# Altium PCB Soldeerstaion2 - Copy.PcbDoc
Units mil, origin at the board's own origin, x right, y up, seen from the top; angles counter-clockwise.
Board outline 6170 x 4230 mil, 2 copper layers (Top Layer, Bottom Layer); 77 components, 72 nets, 289 pads, 36 vias.
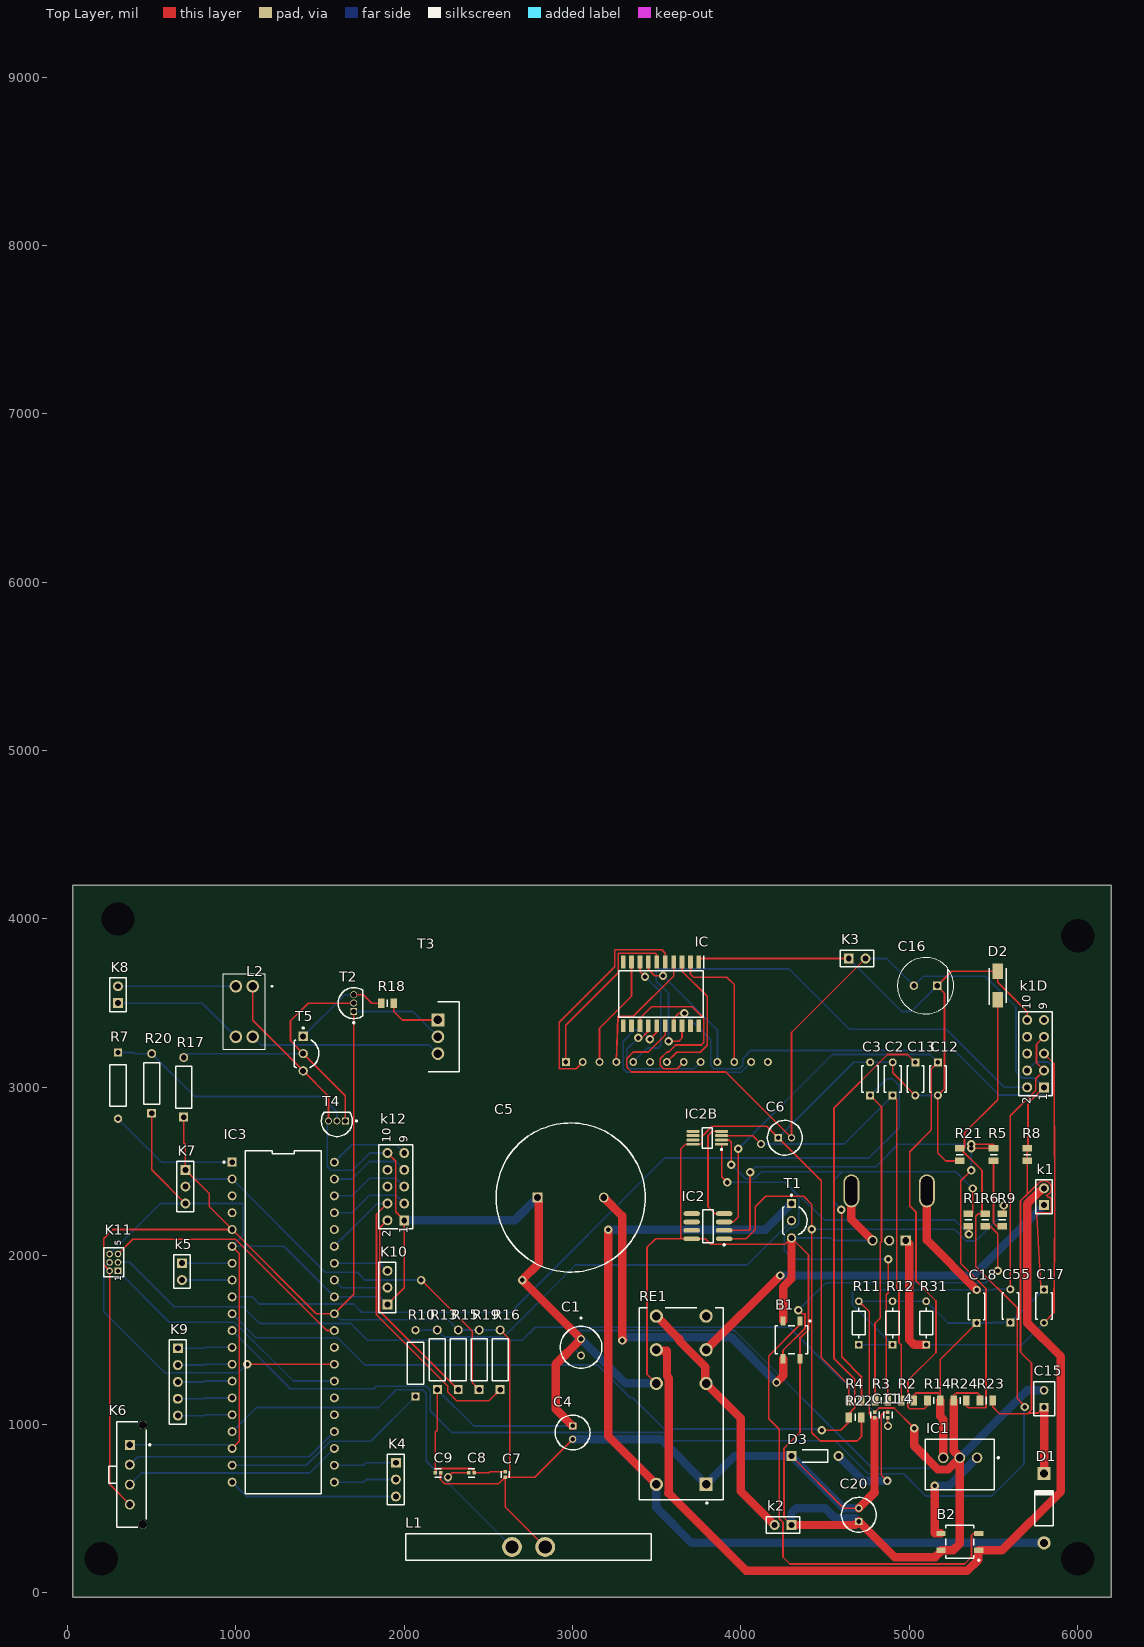
[diagram p0: Top Layer view]
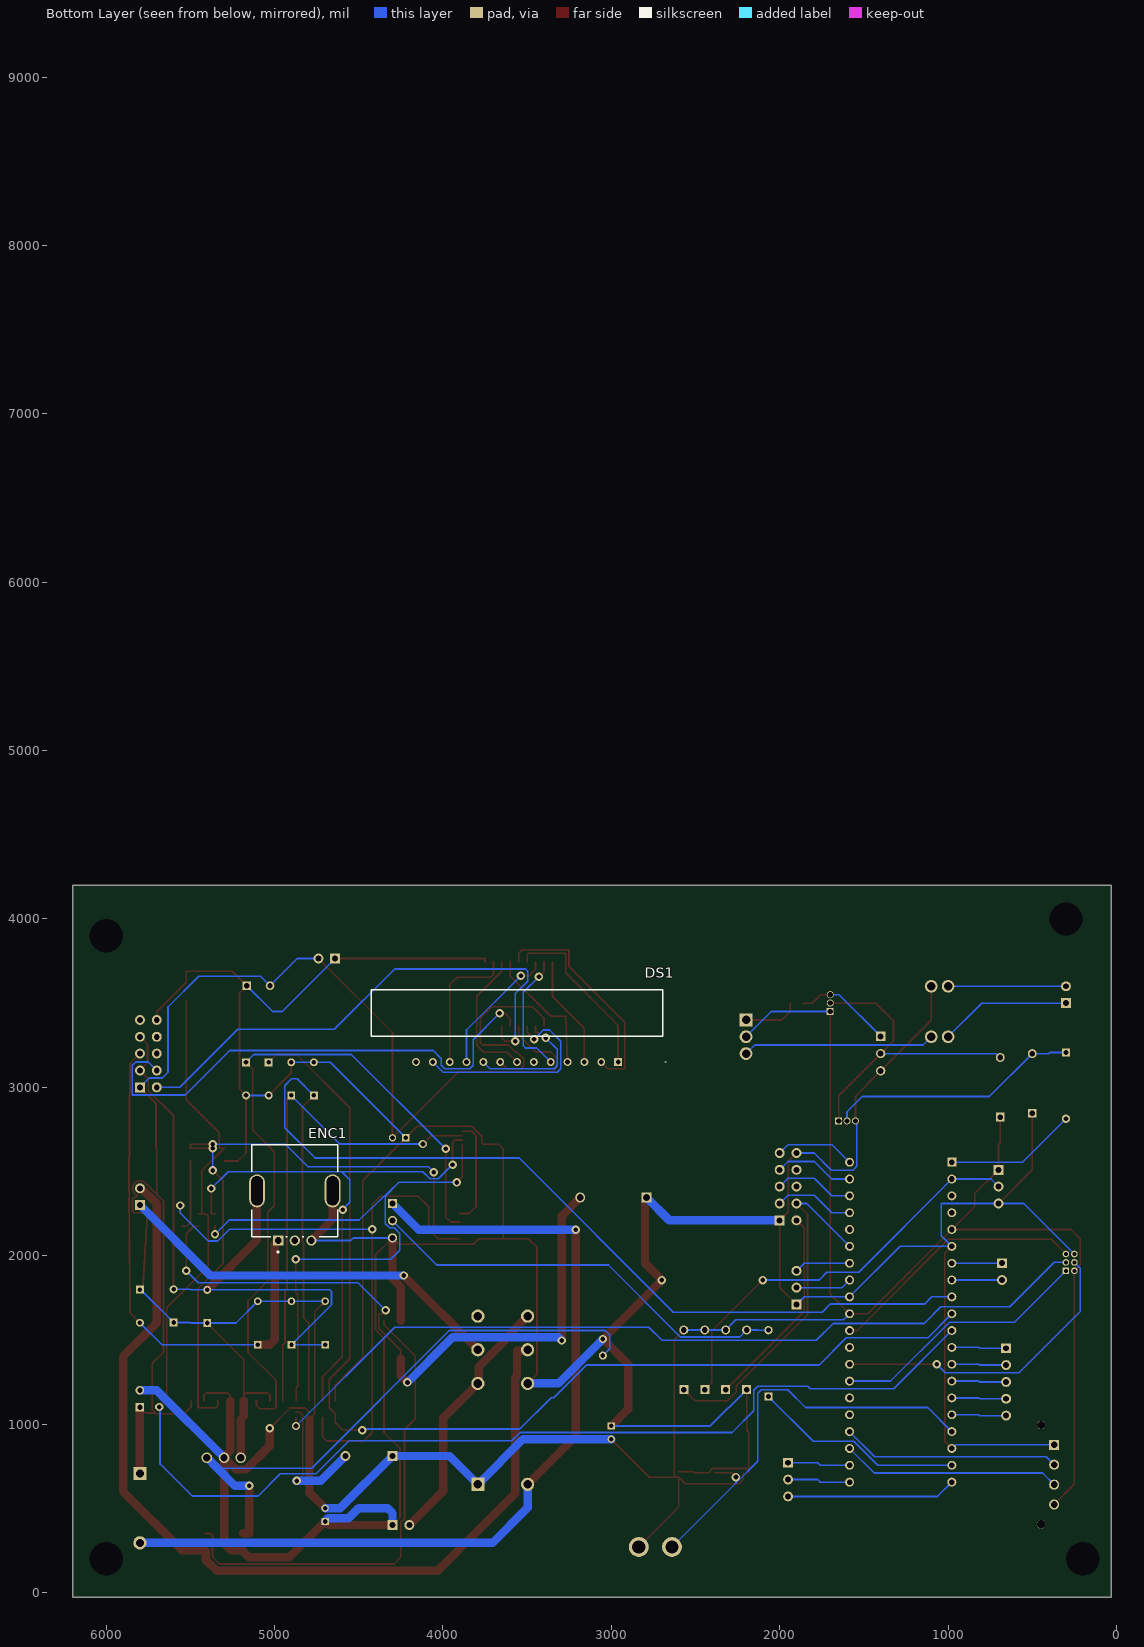
[diagram p1: Bottom Layer view, seen from below]

## Layer stack, top to bottom
Top Solder: solder mask 0.4, Solder Resist, Dk 3.5
Top Layer: signal copper 1.4
Dielectric 1: dielectric 12.6, FR-4, Dk 4.8
Bottom Layer: signal copper 1.4
Bottom Solder: solder mask 0.4, Solder Resist, Dk 3.5

## Board outline
30,-30 6200,-30 6200,4200 30,4200

## Design rules (kind name [scope] priority, off if disabled: settings)
AssemblyTestPointUsage [All] p0: scope1count=1 scope1_0_kind=Board scope1_0_value=Board scope2count=1 scope2_0_kind=Board scope2_0_value=Board commentlength=0
AssemblyTestpoint [All] p0: scope1count=1 scope1_0_kind=Board scope1_0_value=Board scope2count=1 scope2_0_kind=Board scope2_0_value=Board commentlength=0
Clearance [All] p0: scope1count=1 scope1_0_kind=Board scope1_0_value=Board scope2count=1 scope2_0_kind=Board scope2_0_value=Board commentlength=0 gap=10
Clearance [All] p1: gap=10 ignorepadtopadclearanceinfootprint=FALSE except(0: Arc-Hole Track-Hole SMDPad-Hole THPad-Hole Via-Hole Fill-Hole Poly-Hole Region-Hole Text-Hole)
ComponentClearance [All] p0: scope1count=1 scope1_0_kind=Board scope1_0_value=Board scope2count=1 scope2_0_kind=Board scope2_0_value=Board commentlength=0 gap=10 collisioncheckmode=3
DiffPairsRouting [All] p0: scope1count=1 scope1_0_kind=Board scope1_0_value=Board scope2count=1 scope2_0_kind=Board scope2_0_value=Board commentlength=0
FabricationTestPointUsage [All] p0: scope1count=1 scope1_0_kind=Board scope1_0_value=Board scope2count=1 scope2_0_kind=Board scope2_0_value=Board commentlength=0 valid=0 allowmultiple=FALSE
FabricationTestpoint [All] p0: scope1count=1 scope1_0_kind=Board scope1_0_value=Board scope2count=1 scope2_0_kind=Board scope2_0_value=Board commentlength=0 side=3 testpointundercomponent=TRUE minsize=40 maxsize=100 preferedsize=60 minholesize=0 maxholesize=40 preferedholesize=32 testpointgrid=1
FanoutControl Fanout_BGA [All] p0 off: scope1count=1 scope1_0_kind=Board scope1_0_value=Board scope2count=1 scope2_0_kind=Board scope2_0_value=Board commentlength=69 // Protel DXP Scope 1 Expression Was: IsBGA   Fanout_BGA (Default Rule)
FanoutControl Fanout_LCC [All] p0 off: scope1count=1 scope1_0_kind=Board scope1_0_value=Board scope2count=1 scope2_0_kind=Board scope2_0_value=Board commentlength=69 // Protel DXP Scope 1 Expression Was: IsLCC   Fanout_LCC (Default Rule)
FanoutControl Fanout_SOIC [All] p0 off: scope1count=1 scope1_0_kind=Board scope1_0_value=Board scope2count=1 scope2_0_kind=Board scope2_0_value=Board commentlength=71 // Protel DXP Scope 1 Expression Was: IsSOIC   Fanout_SOIC (Default Rule)
FanoutControl Fanout_Small [All] p0 off: scope1count=1 scope1_0_kind=Board scope1_0_value=Board scope2count=1 scope2_0_kind=Board scope2_0_value=Board commentlength=84 // Protel DXP Scope 1 Expression Was: (CompPinCount < 5)   Fanout_Small (Default Rule)
FanoutControl Fanout_Default [All] p0: scope1count=1 scope1_0_kind=Board scope1_0_value=Board scope2count=1 scope2_0_kind=Board scope2_0_value=Board commentlength=30 // Fanout_Default (Default Rule)
Height [All] p0: scope1count=1 scope1_0_kind=Board scope1_0_value=Board scope2count=1 scope2_0_kind=Board scope2_0_value=Board commentlength=0
HoleSize [All] p0: scope1count=1 scope1_0_kind=Board scope1_0_value=Board scope2count=1 scope2_0_kind=Board scope2_0_value=Board commentlength=0 absolutevalues=TRUE maxlimit=100 minlimit=1 maxpercent=80.000 minpercent=20.000
HoleToHoleClearance [All] p0: scope1count=1 scope1_0_kind=Board scope1_0_value=Board scope2count=1 scope2_0_kind=Board scope2_0_value=Board commentlength=0
LayerPairs [All] p0: scope1count=1 scope1_0_kind=Board scope1_0_value=Board scope2count=1 scope2_0_kind=Board scope2_0_value=Board commentlength=0 enforce=TRUE
MinimumSolderMaskSliver [All] p0: scope1count=1 scope1_0_kind=Board scope1_0_value=Board scope2count=1 scope2_0_kind=Board scope2_0_value=Board commentlength=0
NetAntennae [All] p0: scope1count=1 scope1_0_kind=Board scope1_0_value=Board scope2count=1 scope2_0_kind=Board scope2_0_value=Board commentlength=0
PasteMaskExpansion [All] p0: scope1count=1 scope1_0_kind=Board scope1_0_value=Board scope2count=1 scope2_0_kind=Board scope2_0_value=Board commentlength=0 expansion=0
PlaneClearance [All] p0: scope1count=1 scope1_0_kind=Board scope1_0_value=Board scope2count=1 scope2_0_kind=Board scope2_0_value=Board commentlength=0 clearance=20
PlaneConnect [All] p0: scope1count=1 scope1_0_kind=Board scope1_0_value=Board scope2count=1 scope2_0_kind=Board scope2_0_value=Board commentlength=0 planeconnectstyle=Relief reliefexpansion=20 reliefentries=4 reliefconductorwidth=10 reliefairgap=10
PolygonConnect [All] p0: scope1count=1 scope1_0_kind=Board scope1_0_value=Board scope2count=1 scope2_0_kind=Board scope2_0_value=Board commentlength=0 connectstyle=Relief reliefconductorwidth=10 reliefentries=4 polygonreliefangle="90 Angle"
PolygonConnect [All] p1: connectstyle=Relief reliefconductorwidth=10 reliefentries=4 polygonreliefangle="90 Angle" airgapwidth=10
RoutingCorners [All] p0: scope1count=1 scope1_0_kind=Board scope1_0_value=Board scope2count=1 scope2_0_kind=Board scope2_0_value=Board commentlength=0 cornerstyle=45-Degree minsetback=100 maxsetback=100
RoutingLayers [All] p0: scope1count=1 scope1_0_kind=Board scope1_0_value=Board scope2count=1 scope2_0_kind=Board scope2_0_value=Board commentlength=0 top layer=Automatic bottom layer=Automatic
RoutingPriority [All] p0: scope1count=1 scope1_0_kind=Board scope1_0_value=Board scope2count=1 scope2_0_kind=Board scope2_0_value=Board commentlength=0
RoutingTopology [All] p0: scope1count=1 scope1_0_kind=Board scope1_0_value=Board scope2count=1 scope2_0_kind=Board scope2_0_value=Board commentlength=0 topology=Shortest
RoutingVias [All] p0: scope1count=1 scope1_0_kind=Board scope1_0_value=Board scope2count=1 scope2_0_kind=Board scope2_0_value=Board commentlength=0 holewidth=28 width=50 viastyle="Through Hole" minholewidth=28 minwidth=50 maxholewidth=28 maxwidth=50
RoutingVias [All] p1: holewidth=28 width=50 viastyle="Through Hole" minholewidth=28 minwidth=50 maxholewidth=28 maxwidth=50
ShortCircuit [All] p0: scope1count=1 scope1_0_kind=Board scope1_0_value=Board scope2count=1 scope2_0_kind=Board scope2_0_value=Board commentlength=0 allowed=FALSE
SilkToBoardRegionClearance [All] p0: scope1count=1 scope1_0_kind=Board scope1_0_value=Board scope2count=1 scope2_0_kind=Board scope2_0_value=Board commentlength=0
SilkToSilkClearance [All] p0: scope1count=1 scope1_0_kind=Board scope1_0_value=Board scope2count=1 scope2_0_kind=Board scope2_0_value=Board commentlength=0
SilkToSolderMaskClearance [All] p0 off: scope1count=1 scope1_0_kind=Board scope1_0_value=Board scope2count=1 scope2_0_kind=Board scope2_0_value=Board commentlength=44 // Protel DXP Scope 1 Expression Was: IsPad
SolderMaskExpansion [All] p0: scope1count=1 scope1_0_kind=Board scope1_0_value=Board scope2count=1 scope2_0_kind=Board scope2_0_value=Board commentlength=0 expansion=4
SolderMaskExpansion [All] p1: expansion=4 istentingtop=FALSE
UnRoutedNet [All] p0: scope1count=1 scope1_0_kind=Board scope1_0_value=Board scope2count=1 scope2_0_kind=Board scope2_0_value=Board commentlength=0
UnpouredPolygon [All] p0: scope1count=1 scope1_0_kind=Board scope1_0_value=Board scope2count=1 scope2_0_kind=Board scope2_0_value=Board commentlength=0
Width [All] p0: scope1count=1 scope1_0_kind=Board scope1_0_value=Board scope2count=1 scope2_0_kind=Board scope2_0_value=Board commentlength=0 maxlimit=50 minlimit=50 preferedwidth=50
Width [All] p1: maxlimit=50 minlimit=50 preferedwidth=50 minimp=50.000000 maximp=50.000000 favimp=50.000000
30 further rules are at their usual default settings.

## Classes and differential pairs
component class voeding: B1 B2 C1 C5 C20 D1 D2 IC1 k1 k2 R6 R21 RE1
component class thermokoppel: C2 C3 C6 C7 C12 C13 IC2 IC2B K3 R1 R2 R3 R4 R5 R8 R9 R14 R22 R23 R24
component class "PWU soldeerbout": K8 L2 R17 R18 R20 T2 T3 T4 T5
component class Display: C15 C16 C17 C18 C55 DS1 ENC1 IC k1D R11 R12 R31
component class CPU: C4 C8 C9 C11 C14 D3 IC3 K4 k5 K6 K7 K9 K10 K11 k12 L1 R7 R10 R13 R15 R16 R19 T1

## Components (designator, comment, footprint, x,y, rotation, side; value= is the part's Value field where it differs from the comment)
B1 "MB6S-TP" FP-MBS-1-MFG 4300,1500 r0 top
B2 "MB6S-TP" FP-MBS-1-MFG 5300,300 r270 top
C1 "100uF 25V" MCGPR25V107M6.3X11 3050,1455.79 r90 top
C2 "10nf" FP-RDE0M1-MFG 4901.26,3050.08 r90 top
C3 "10nf" FP-RDE0M1-MFG 4767.09,3050.08 r90 top
C4 "10uF 50V" CAPPRD200W52D525H1200 3000,988.73 r270 top
C5 "4700uF  50V" CAPPRD1000W82D2250H4300 2791.3,2345 r0 top
C6 "MCGPR50V106M5X11" CAPPRD200W52D525H1200 4221.26,2700 r0 top
C7 "100nf" FP-C0402-BB-MFG 2600,700 r90 top
C8 "100n" FP-C0402-BB-MFG 2400,709.99 r0 top
C9 "100n" FP-C0402-BB-MFG 2200,709.99 r180 top
C11 "100n" FP-C0402-BB-MFG 4794.76,1053.85 r90 top
C12 "10nf" FP-RDE0M1-MFG 5169.61,3050.08 r270 top
C13 "10nf" FP-RDE0M1-MFG 5035.43,3050.08 r270 top
C14 "100n" FP-C0402-BB-MFG 4872.64,1053.85 r270 top
C15 "100nf" FP-C320C-MFG 5800,1150 r90 top
C16 "100uf" FP-RAD-TH-D_8_0_5-L_11_5-MFG 5096.1,3603.43 r180 top
C17 "10nf" FP-RDE0M1-MFG 5800,1700 r270 top
C18 "10nf" FP-RDE0M1-MFG 5400,1698.43 r90 top
C20 "10uF 50V" CAPPRD200W52D525H1200 4700,421.26 r90 top
C55 "10nf" FP-RDE0M1-MFG 5600,1701.57 r90 top
D1 "Diode 1N4007" DO-41 5800,500 r90 top
D2 "5,1V 500mW" DIOM5226X240N 5525,3605 r90 top
D3 "Diode 1N4148" DO-35 4439.76,809.99 r180 top
DS1 "LTC_46454G" LTC46454G 2960,3150 r0 bottom
ENC1 "PEC11R-4015F-N0024" FP-PEC11R-4015F-N0024-MFG 4880,2385 r180 bottom
IC "TM1637" SOIC127P1045X280-20N 3525,3555 r270 top
IC1 "OKI-78SR-5/1.5-W36-C" MURA-OKI-78SR-3 5300,800 r180 top
IC2 "IC2A" SOIC-SN8_M 3803.54,2175 r180 top
IC2B "MCP6002-E/MS" MSOP-MS8_M 3800,2700 r180 top
IC3 "ATMEGA4809-PF" FP-C04-016-MFG 1281.25,1604.99 r0 top
k1 "Header 2" HDR1X2 5800,2300 r90 top
k1D "Header 5X2" HDR2X5 5800,3000 r90 top
k2 "Header 2" HDR1X2 4300,400 r180 top
K3 "Header 2" HDR1X2 4640,3765 r0 top
K4 "Header 3" HDR1X3 1950,769.99 r270 top
k5 "Header 2" HDR1X2 680,1954.99 r270 top
K6 "66200411122" 66200411122 380.04,699.04 r90 top
K7 "Header 3" HDR1X3 700,2509.99 r270 top
K8 "Header 2" HDR1X2 300,3500 r90 top
K9 "Header 5" HDR1X5 655,1449.99 r270 top
K10 "Header 3" HDR1X3 1900,1709.99 r90 top
K11 "MHDR2X3" MHDR2X3 300,1909.99 r90 top
k12 "Header 5X2" HDR2X5 2000,2209.99 r90 top
L1 "760308201" 3737 2738.43,269.99 r0 top
L2 "CM2545X171B-10" CM2545X171B10 1100,3600 r180 top
R1 "18K" RESC2012X65N 5350.35,2212.09 r90 top
R2 "5K6" RESC2012X65N 4989.57,1139.65 r0 top
R3 "5K6" RESC2012X65N 4833.74,1139.65 r0 top
R4 "100ohm" RESC2012X60N 4677.91,1139.65 r0 top
R5 "18K" RESC2012X65N 5500,2600 r90 top
R6 "68K" RESC2012X60N 5451.06,2212.09 r270 top
R7 "10k" FP-MBB0207-MFG 300,3009.99 r270 top
R8 "1M" RESC2012X65N 5700,2600 r90 top
R9 "18K" RESC2012X65N 5551.77,2212.09 r270 top
R10 "10k" FP-MBB0207-MFG 2067.09,1360.66 r90 top
R11 "10k" FP-CF18-MFG 4700,1600 r90 top
R12 "10k" FP-CF18-MFG 4900,1600 r90 top
R13 "4K75" RESA60-630X240 2196.34,1381.33 r90 top
R14 "5K6" RESC2012X65N 5145.39,1139.65 r0 top
R15 "4K75" RESA60-630X240 2320.67,1381.33 r90 top
R16 "4K75" RESA60-630X240 2569.33,1381.33 r90 top
R17 "4K75" RESA60-630X240 690,3000 r90 top
R18 "100ohm" RESC2012X60N 1900,3500 r0 top
R19 "4K75" RESA60-630X240 2445,1381.33 r90 top
R20 "4K75" RESA60-630X240 500,3022.83 r90 top
R21 "10K" RESC2012X65N 5300,2600 r90 top
R22 "5K6" RESC2012X65N 4677.91,1038.94 r0 top
R23 "10M" RESC2013X65N 5457.05,1139.65 r0 top
R24 "100ohm" RESC2012X60N 5301.22,1139.65 r0 top
R31 "10K" FP-CF18-MFG 5100,1600 r90 top
RE1 "RT424005F" FP-RT424005F-MFG 3645,1120 r90 top
T1 "BC547CZL1G" ONSC-TO-92-3-29-11_AM_BL 4300,2207.63 r270 top
T2 "BC547B" ONSC-TO-92-3-29-11 1700,3500 r90 top
T3 "IRF9Z34NPBF" TO254P469X1042X1967-3P 2200,3400 r270 top
T4 "T4" ONSC-TO-92-3-29-11 1600,2800 r180 top
T5 "T5" ONSC-TO-92-3-29-11_AM_BL 1400,3200 r270 top

## Footprints (in the part's own frame and the unit in brackets; to place one, negate y for a bottom-side part, rotate by r counter-clockwise, add the part's x,y. Pads: shape width x height; smd on the part's side, far side on the other; paste and mask are expansions set on the pad)
3737 [mm] "THT Charging Coil ,2 Pin, Body 37x37mm"
  round 3 hole 2: 1(-2.5,0) 2(2.5,0)
  silkscreen extent -18.5,-2 18.5,2
66200411122 [mm] "3.00mm Male Single Row Vertical Header, 4p"
  rect 1.52x1.52 hole 1.02: 1(4.5,0.255)
  round 1.52 hole 1.02: 2(1.5,0.255) 3(-1.5,0.255) 4(-4.5,0.255)
  round 1.27 hole 1.27 unplated: MH1(-7.5,-1.705) MH2(7.5,-1.705)
  silkscreen extent -7.95,-2.88 7.95,3.46
CAPPRD200W52D525H1200 [mm]
  rect 1.1x1.1 hole 0.7: 1(0,0)
  round 1.1 hole 0.7: 2(2,0)
  silkscreen extent -1.62,-2.62 3.62,2.63
CAPPRD1000W82D2250H4300 [mm]
  rect 1.5x1.5 hole 1: 1(0,0)
  round 1.5 hole 1: 2(10,0)
  silkscreen extent -6.25,-11.25 16.25,11.25
CM2545X171B10 [mil]
  round 75 hole 50: 1(0,0) 2(100,0) 3(100,300) 4(0,300)
  silkscreen extent -118,-74 174,374
DIOM5226X240N [mm]
  rect 2.35x1.55 smd: 1(-2.15,0) 2(2.15,0)
  silkscreen extent -2.93,-1.3 2.6,1.3
DO-35 [mm] "Diode, Axial; Body 3.8 x 1.9 mm (LxDia. max), Lead Dia. 0.53 mm (max)"
  round 1.5 hole 0.9: 1(-3.55,0)
  rect 1.5x1.5 hole 0.9: 2(3.55,0)
  silkscreen extent -1.95,-0.95 1.95,0.95
DO-41 [mm] "Diode, Axial; Body 5.2 x 2.7 mm (LxDia. max), Lead Dia. 0.86 mm (max)"
  round 2 hole 1.2: 1(-5.23,0)
  rect 2x2 hole 1.2: 2(5.23,0)
  silkscreen extent -2.65,-1.41 2.75,1.4
FP-C04-016-MFG [mm]
  rect 1.35x1.35 hole 0.85 paste-1000 mask+0: 1(-7.715,24.13)
  round 1.35 hole 0.85 paste-1000 mask+0: 2(-7.715,21.59) 3(-7.715,19.05) 4(-7.715,16.51) 5(-7.715,13.97) 6(-7.715,11.43) 7(-7.715,8.89) 8(-7.715,6.35) 9(-7.715,3.81) 10(-7.715,1.27) 11(-7.715,-1.27) 12(-7.715,-3.81) 13(-7.715,-6.35) 14(-7.715,-8.89) 15(-7.715,-11.43) 16(-7.715,-13.97) 17(-7.715,-16.51) 18(-7.715,-19.05) 19(-7.715,-21.59) 20(-7.715,-24.13) 21(7.715,-24.13) 22(7.715,-21.59) 23(7.715,-19.05) 24(7.715,-16.51) 25(7.715,-13.97) 26(7.715,-11.43) 27(7.715,-8.89) 28(7.715,-6.35) 29(7.715,-3.81) 30(7.715,-1.27) 31(7.715,1.27) 32(7.715,3.81) 33(7.715,6.35) 34(7.715,8.89) 35(7.715,11.43) 36(7.715,13.97) 37(7.715,16.51) 38(7.715,19.05) 39(7.715,21.59) 40(7.715,24.13)
  silkscreen extent -9.06,-25.88 5.76,25.88
FP-C320C-MFG [mm]
  rect 1.3x1.3 hole 0.8 paste-1000 mask+0: 1(-1.27,0)
  round 1.3 hole 0.8 paste-1000 mask+0: 2(1.27,0)
  silkscreen extent -2.54,-1.59 2.54,1.59
FP-C0402-BB-MFG [mm]
  rect 0.52x0.52 smd paste+0 mask+0: 1(-0.4,0) 2(0.4,0)
  silkscreen extent -0.5,-0.64 0.5,0.64
FP-CF18-MFG [mm]
  rect 1.15x1.15 hole 0.65 paste-1000 mask+0: 1(-3.28,0)
  round 1.15 hole 0.65 paste-1000 mask+0: 2(3.28,0)
  silkscreen extent -2.3,-1 2.3,1
FP-MBB0207-MFG [mm]
  rect 1.25x1.25 hole 0.75 paste-1000 mask+0: 1(-5,0)
  round 1.25 hole 0.75 paste-1000 mask+0: 2(5,0)
  silkscreen extent -3.15,-1.25 3.15,1.25
FP-MBS-1-MFG [mm]
  rect 0.8x1.4 smd paste+0 mask+0: 1(1.27,2.85) 2(-1.27,2.85) 3(-1.27,-2.85) 4(1.27,-2.85)
  silkscreen extent -2.47,-2.1 2.9,2.97
FP-PEC11R-4015F-N0024-MFG [mm]
  rrect100% 2.4x5 hole 4.4 slot 1.8 at 0 deg paste-1000 mask+0: 1(-5.7,0) 2(5.7,0)
  rect 1.55x1.55 hole 1 paste-1000 mask+0: A(-2.5,-7.5)
  round 1.55 hole 1 paste-1000 mask+0: B(2.5,-7.5) C(0,-7.5)
  Top Component Center keep-out region: 13.232,-40.955 12.432,-40.955 12.432,-39.055 13.232,-39.055
  silkscreen extent -6.5,-9.35 6.5,6.95
FP-RAD-TH-D_8_0_5-L_11_5-MFG [mm]
  rect 1.3x1.3 hole 0.8 paste-1000 mask+0: 1(-1.75,0)
  round 1.3 hole 0.8 paste-1000 mask+0: 2(1.75,0)
  silkscreen extent -4.25,-4.25 4.25,4.25
FP-RDE0M1-MFG [mm]
  rect 1.2x1.2 hole 0.7 paste-1000 mask+0: 1(-2.5,0)
  round 1.2 hole 0.7 paste-1000 mask+0: 2(2.5,0)
  silkscreen extent -2,-1.25 2,1.25
FP-RT424005F-MFG [mm]
  round 2 hole 1.3 paste-1000 mask+0: 11(8.15,-3.75) 12(3.07,-3.75) 14(13.23,-3.75) 21(8.15,3.75) 22(3.07,3.75) 24(13.23,3.75) A2(-12.15,3.75)
  rect 2x2 hole 1.3 paste-1000 mask+0: A1(-12.15,-3.75)
  silkscreen extent -15.1,-6.35 14.5,6.35
HDR1X2 [mm] "Connector; Header; 2 Position"
  rect 1.5x1.5 hole 0.9: 1(0,0)
  round 1.5 hole 0.9: 2(2.54,0)
  silkscreen extent -1.27,-1.27 3.81,1.27
HDR1X3 [mm] "Connector; Header; 3 Position"
  rect 1.5x1.5 hole 0.9: 1(0,0)
  round 1.5 hole 0.9: 2(2.54,0) 3(5.08,0)
  silkscreen extent -1.27,-1.27 6.35,1.27
HDR1X5 [mm] "Connector; Header; 5 Position"
  rect 1.5x1.5 hole 0.9: 1(0,0)
  round 1.5 hole 0.9: 2(2.54,0) 3(5.08,0) 4(7.62,0) 5(10.16,0)
  silkscreen extent -1.27,-1.27 11.43,1.27
HDR2X5 [mm] "Connector; Header; 5x2 Position"
  rect 1.5x1.5 hole 0.9: 1(0,0)
  round 1.5 hole 0.9: 2(0,2.54) 3(2.54,0) 4(2.54,2.54) 5(5.08,0) 6(5.08,2.54) 7(7.62,0) 8(7.62,2.54) 9(10.16,0) 10(10.16,2.54)
  silkscreen extent -1.27,-1.27 11.43,3.81
LTC46454G [mm]
  rect 1.2x1.2 hole 0.7: 1(0,0)
  round 1.2 hole 0.7: 2(2.54,0) 3(5.08,0) 4(7.62,0) 5(10.16,0) 6(12.7,0) 7(15.24,0) 8(17.78,0) 9(20.32,0) 10(22.86,0) 11(25.4,0) 12(27.94,0) 13(30.48,0)
  silkscreen extent -7.2,-10.9 37.24,0.05
MCGPR25V107M6.3X11 [mm]
  round 1.2 hole 0.7: 1(1.25,0) 2(-1.25,0)
  silkscreen extent -3.15,-3.15 4.53,3.15
MHDR2X3 [mm] "Connector; Header; 3x2 Position"
  rect 1x1 hole 0.6: 1(0,0)
  round 1 hole 0.6: 2(0,1.27) 3(1.27,0) 4(1.27,1.27) 5(2.54,0) 6(2.54,1.27)
  silkscreen extent -0.9,-0.9 3.44,2.17
MSOP-MS8_M [mm] "TSOP, 8-Leads, Body 3x3mm, Pitch 0.65mm, IPC Low Density"
  oval 2x0.45 smd: 1(-2.15,0.975) 2(-2.15,0.325) 3(-2.15,-0.325) 4(-2.15,-0.975) 5(2.15,-0.975) 6(2.15,-0.325) 7(2.15,0.325) 8(2.15,0.975)
  silkscreen extent -2.27,-1.55 0.75,1.87
MURA-OKI-78SR-3 [mm] "THMT, 3-Leads, Body 10.4x7.6mm"
  round 1.6 hole 1.1: 1(-2.6,0) 2(0,0) 3(2.5,0)
  silkscreen extent -5.92,-2.8 5.2,4.8
ONSC-TO-92-3-29-11 [mm] "TO, 3-Leads, Body Dia 4.7mm, Pitch 1.27mm"
  rect 1.05x1.05 hole 0.8: 1(-1.27,0)
  round 1.05 hole 0.8: 2(0,0) 3(1.27,0)
  silkscreen extent -3.07,-1.34 2.35,2.35
ONSC-TO-92-3-29-11_AM_BL [mm] "TO, 3-Leads, Body Dia 4.7mm, Pitch 2.6mm"
  rect 1.4x1.4 hole 0.9: 1(-2.6,0)
  round 1.4 hole 0.9: 2(0,0) 3(2.6,0)
  silkscreen extent -3.97,-1.34 2.13,2.35
RESA60-630X240 [mm] "Axial Resistor, 2-Leads, Dia 2.4mm, Body Length 6.3mm"
  rect 1.35x1.35 hole 0.85: 1(-4.5,0)
  round 1.35 hole 0.85: 2(4.5,0)
  silkscreen extent -3.15,-1.2 3.15,1.2
RESC2012X60N [mm]
  rect 1x1.45 smd: 1(-0.95,0) 2(0.95,0)
  silkscreen extent 0,-0.53 0,0.52
RESC2012X65N [mm]
  rect 1x1.45 smd: 1(-0.95,0) 2(0.95,0)
  silkscreen extent 0,-0.53 0,0.52
RESC2013X65N [mm]
  rect 1x1.45 smd: 1(-0.95,0) 2(0.95,0)
  silkscreen extent 0,-0.54 0,0.54
SOIC127P1045X280-20N [mm]
  rect 1.9x0.7 smd: 1(-4.8,5.715) 2(-4.8,4.445) 3(-4.8,3.175) 4(-4.8,1.905) 5(-4.8,0.635) 6(-4.8,-0.635) 7(-4.8,-1.905) 8(-4.8,-3.175) 9(-4.8,-4.445) 10(-4.8,-5.715) 11(4.8,-5.715) 12(4.8,-4.445) 13(4.8,-3.175) 14(4.8,-1.905) 15(4.8,-0.635) 16(4.8,0.635) 17(4.8,1.905) 18(4.8,3.175) 19(4.8,4.445) 20(4.8,5.715)
  silkscreen extent -5.75,-6.35 3.5,6.42
SOIC-SN8_M [mm] "SOIC, 8-Leads, Body 4.9x3.9mm, Pitch 1.27mm, IPC Low Density"
  oval 2.5x0.7 smd: 1(-2.45,1.905) 2(-2.45,0.635) 3(-2.45,-0.635) 4(-2.45,-1.905) 5(2.45,-1.905) 6(2.45,-0.635) 7(2.45,0.635) 8(2.45,1.905)
  silkscreen extent -2.58,-2.5 0.8,2.93
TO254P469X1042X1967-3P [mm]
  rect 1.92x1.92 / inner round 1.92 / far side rect 1.92x1.92 hole 1.28: 1(0,0)
  round 1.92 hole 1.28: 2(2.54,0) 3(5.08,0)
  silkscreen extent -2.73,-1.49 7.81,3.2

## Part data
B1 B2: library part CMP-56207-000002-1, "BRIDGE RECT 1P 600V 500MA MBS-1"
C1: library part MCGPR25V107M6.3X11, "Capacitor / MCGPR25V107M6.3X11"
C2 C3 C12 C13 C17 C18 C55: library part CMP-06035-022384-1, "Ceramic Capacitor 10nF ±10% 50V X7R Radial"
C4 C20: library part MCGPR50V106M5X11, "Capacitor Polarised / MCGPR50V106M5X11"
C5: library part MCGPR50V478M22X41, "Capacitor  / MCGPR50V478M22X41"
C6: "Capacitor Polarised"
C7 C8 C9 C11 C14: library part CMP-2008-02046-2, "CAP CER 0.1UF 10V X5R 0402"
C15: library part CMP-03020-013948-1, "CAP CER 0.1UF 50V X7R RADIAL"
C16: library part CMP-05427-002079-1, "Aluminum Electrolytic Capacitors (Radial Lead Type) 100uF ±20% 50V"
D1: "1 Amp General Purpose Rectifier"
D2: library part SMAZ5V1-13-F, "Zener Diode / SMAZ5V1-13-F"
D3: "High Conductance Fast Diode"
DS1: "Display"
ENC1: library part CMP-07421-000003-1, "ROTARY ENCODER MECHANICAL 24PPR"
IC: library part TM1637__SOP_, "LED Drive Control Special Circuit"
IC1: library part CMP-2000-05274-1, "Non-Isolated DC/DC Converter, 7.5 W, 7 to 36 V, 1.5 A, -40 to 85 degC, 3-Pin THD, RoHS"
IC2: library part CMP-0187-00365-3, "None"
IC2B: library part CMP-0187-00576-3, "None"
IC3: library part CMP-06276-000616-1, "IC MCU 8BIT 48KB FLASH 40DIP"
k1 k2 K3 k5 K8: "Header, 2-Pin"
k1D k12: "Header, 5-Pin, Dual row"
K4 K7 K10: "Header, 3-Pin"
K6: library part CMP-1502-00442-1, "THT Male Header WR-MPC3, Vertical, Single Row, pitch 3 mm, 4 pins"
K9: "Header, 5-Pin"
K11: "Header, 3-Pin, Dual row"
L1: library part CMP-1432-00001-1, "Wireless Power Charging Coil  WE-WPCC, L=10.0 µH"
L2: "Transformer"
R1 R5 R9: library part CPF0805B18KE, "Resistor / CPF0805B18KE"
R2 R3 R14 R22: library part CPF0805B5K62E, "Resistor / CPF0805B5K62E"
R4 R18 R24: library part CR0805-JW-101ELF, "Resistor / CR0805-JW-101ELF"
R6: library part CR0805-FX-6802GLF, "Resistor / CR0805-FX-6802GLF"
R7 R10: library part CMP-02408-000035-1, "RES 10K OHM 0.6W 1% AXIAL"
R8: library part CPF0805B1M0E, "Resistor / CPF0805B1M0E"
R11 R12 R31: library part CMP-26528-000002-1, "RES 10K OHM 1/8W 5% CF AXIAL"
R13 R15 R16 R17 R19 R20: library part CMP-1659-00066-1, "Axial Resistor, 4.75 KOhm, +/- 1%, 0.25 W, -55 to 155 degC, 2-Pin THD, RoHS, Bulk"
R21: library part CPF0805B10KE, "Resistor / CPF0805B10KE"
R23: library part CRGH0805J10M, "Resistor / CRGH0805J10M"
RE1: library part CMP-03395-000296-1, "RELAY GENERAL PURPOSE DPDT 8A 5V"
T1: library part CMP-1048-01606-1, "Amplifier Transistor, NPN Silicon, 3-Pin TO-92, Pb-Free, Ammo Box"
T2 T4: library part CMP-1048-01467-1, "Amplifier Transistor, NPN Silicon, 3-Pin TO-92, Bulk Box"
T3: "MOSFET MOSFT PCh -55V -17A 100mOhm 23.3nC"
T5: library part CMP-1048-01514-1, "Amplifier Transistor, PNP Silicon, 3-Pin TO-92, Pb-Free, Ammo Box"

## Free pads (board coordinates)
  oval 25x50 hole 314.96: 32(2700,9000)
  oval 25x50 hole 196.85: 32(6000,3900) 33(300,4000) 34(6000,200) 35(200,200)

## Via types
v1: diameter 50, hole 28, Top Layer to Bottom Layer, 36 vias

## Nets (pads, with @x,y where several pads share a name; then routed paths per layer and width w, separated by ;. In a path a pad name is that pad's centre, name@x,y a point inside that pad or via, vN(x,y) a via of type N, cw(c..) or ccw(c..) an arc to the next point about the centre after c; other vN are vias at no path point)
+5V: C4.2 C6.2 C7.1 C9.1 C11.1 C15.1 C16.2 C17.1 C18.1 C20.2 C55.1 D1.2 D3.2 IC1.3 IC3.5 IC3.31 IC.16 k1D.1 K3.2 K6.4 K7.1 K11.2 L1.2 R2.2 R8.1 R8.2 R11.2 R12.2 R14.2 R15.2 R16.2 R17.1 R19.2 R23.2 R31.2 RE1.A1 T2.1 T3.2 | length 24146.2
  Top Layer w10: K6.4 250,641.88 K11.2 215,1944.99 215,2100 269.99,2154.99 IC3.5 ; R17.1 690,2671 700,2661 K7.1 841,2368.99 841,2291.49 IC3.5 ; T2.1 1700,1769.99 IC3.31 1477.5,1654.99 IC3.5 ; C9.1 2215.75,670 2241.3,644.45 2560.19,644.45 C7.1 ; R16.2 2626,1501.82 2626,700 2610.25,684.25 ; L1.2 2600,506.84 C7.1 ; C4.2 2774.26,684.25 2610.25,684.25 ; IC.16 3550,3310.1 3449.9,3210 3361,3210 3321,3170 3321,3120 3350,3091 3909,3091 C6.2 4300,3325 K3.2 ; D3.2 4609.99,500 C20.2 ; R11.2 4761,1668.13 4761,1060 4782.9,1038.1 ; R2.2 5026.97,1170.97 5040,1184 5170,1184 5182.8,1171.2 ; R14.2 5182.8,1171.2 ; C18.1 5182.8,1382.8 5182.8,1171.2 ; R23.2 5494.45,1102.55 5535.93,1061.07 5702.49,1061.07 5706.42,1065 5710,1065 ; C15.1 5765,1065 5710,1065 ; C17.1 5781.38,1817.05 5756.59,2244.89 5756.59,2249.61 5762.45,2255.47 5835.74,2255.47 5844.53,2264.26 5844.53,2335.74 5833.46,2346.81 5825.52,2346.81 5814.45,2357.88 ccw(c5800,2400) 5765.06,2427.6 5756.54,2419.08 5753.96,2419.08 5700,2365.12 ; k1D.1 5705,2905 5705,2637.4 R8.2 R8.1 5700,2365.12 ; C7.1 2610.25,684.25 ; 5700,2365.12 5660,2325.12 5660,1426.5 5725.93,1360.57 5725.93,1084.51 5710,1068.58 5710,1065
  Top Layer w50: C20.2 4794.76,594.76 4793,596.53 4793,1024.36 ; R14.2 5182.8,1046.74 5201.57,1027.96 IC1.3 5201.57,796.43 IC1.3@5201.42,796.27 ; D1.2 C15.1
  Bottom Layer w10: IC3.31 1620.99,1619 2260.16,1619 R15.2 R19.2 R16.2 ; T2.1 2050,3450 T3.2 ; R11.2 R12.2 R31.2 5229.13,1600 C18.1 5498,1600 5501.15,1603.15 C55.1 5795.28,1798.43 C17.1 ; K3.2 4865.63,3765 C16.2 5083.78,3660 5450,3660 5633,3477 5633,3090 5668,3055 5745,3055 k1D.1
  Bottom Layer w50: C4.2 3524.3,909.99 RE1.A1 3960.97,809.99 D3.2 4609.99,500 C20.2
GND: B1.2 B1.4 B2.4 C1.1 C2.2 C3.2 C4.1 C5.1 C6.1 C7.2 C8.2 C9.2 C11.2 C12.2 C13.2 C15.2 C16.1 C20.1 D2.2 ENC1.2 ENC1.B IC1.2 IC2.8 IC2B.8 IC3.6 IC3.18 IC3.32 IC.1 k1D.10 k2.1 K3.1 K6.1 K7.3 K10.1 K11.6 k12.1 k12.10 L2.1 R4.1 R13.1 R20.1 R21.1 R23.1 R24.1 RE1.22 T1.3 T4.3 T5.3 | length 29096
  Top Layer w10: R20.1 500,2509.99 K7.3 ; IC3.18 1020,897.49 1020,2012.49 IC3.6 ; L2.1 1100,3397.64 T5.3 1550,2947.64 T4.3 ; K10.1 2000,1809.99 k12.1 1950,2259.99 1950,2559.99 k12.10 ; C9.2 2184.25,721.25 ; R13.1 2196.34,963.09 2184.25,951 2184.25,721.25 ; C7.2 2509.76,715.75 2504,709.99 C8.2 2415.75,720.25 2400,736 2199,736 2184.25,721.25 ; RE1.22 3442,1296.23 3442,2049 3493,2100 3652,2100 ; IC.1 3750,3765 K3.1 ; k2.1 4255.47,444.53 4255.47,855.47 4350,950 B1.4 4350,1509.25 4400.75,1560 4400.75,2004.52 T1.3 4261.73,2067 3820,2067 3787,2100 IC2.8 3652,2100 ; R4.1 4640.51,1232 4477,1395.51 4477,2444.26 C6.1 4152.26,2769 3830,2769 3770,2709 3770,2671.61 3760,2661.61 IC2B.8 3670,2661.61 3642,2633.61 3642,2110 3652,2100 ; C11.2 4820.17,1095 4909,1095 v1(5029,975) ; C2.2 4901.26,3085.83 C13.2 ; R24.1 5263.82,1170 5277.82,1184 5405.65,1184 5419.65,1170 R23.1 ; R21.1 5217.01,2562.6 5169.61,2610 C12.2 5209,2991.05 5209,3559.43 C16.1 5251.22,3689.65 D2.2 5525,3623 5700,3448 k1D.10
  Top Layer w50: C5.1 C5.1@2795.83,2349.53 ; 2800,2312.6 2800,1955 v1(2700,1855) C1.1 2900,1355 2900,1088.73 C4.1 ; B1.2 4250,1813.38 4297.75,1861.13 4297.75,1872.15 4300,1874.4 T1.3 ; k2.1 4678.74,400 C20.1 4912.26,209 5153.49,209 5187.8,243.31 B2.4 5260,250 5300,290 IC1.2 ; ENC1.2 4655.59,2215.71 ENC1.B ENC1.B@4784.21,2089.72 ; v1(5029,975) 5029,870.82 5169.82,730 5230,730 IC1.2 ; R24.1 5263.82,839.7 5300,803.52 IC1.2
  Bottom Layer w10: K11.6 550,2309.99 K7.3 1039.01,2309.99 1040,2309 1040,2117.49 IC3.6 1285,2054.99 IC3.32 1855,1754.99 K10.1 ; K6.1 956.28,876.21 IC3.18 ; T4.3 1543,2793 1543,2530 1565,2508 1693,2508 1794.99,2609.99 k12.10 ; R13.1 2411.77,988.73 C4.1 ; C6.1 4669.76,3148.5 C3.2 C2.2 ; T1.3 4533,2105.27 4548.54,2089.72 ENC1.B ; K3.1 4955,3450 5011.57,3450 C16.1 ; C13.2 C12.2
  Bottom Layer w50: k12.1 2656.29,2209.99 C5.1 ; C1.1 3314.13,1240.87 RE1.22 ; k2.1 4300,470.71 4329.29,500 4500,500 4560,440 4681.26,440 C20.1 ; IC1.2 5699.77,1199.77 5799.77,1199.77 C15.2
NetB1_1: B1.1 B2.2 | length 2844.7
  Top Layer w10: B1.1 4350,1589 4164.54,1403.54 4164.54,1031.46 4228,968 4228,438 4250,416 4250,210 4291,169 5328,169 5369,210 5369,340 5379,350 B2.2
NetB2_1: B2.1 k1.2 RE1.21 | length 5591.9
  Top Layer w50: RE1.21 3502.8,1435.43 3560.57,1435.43 3560.57,1282.84 3571.73,1271.67 3571.73,592.61 3569.05,589.93 4029.99,129 5344.57,129 5409.64,194.08 B2.1@5409.64,246.64 ; B2.1 5550,250 5900,600 5900,1400 5700,1600 5700,2308.55 5770.52,2379.08 5773.1,2379.08 5796.59,2402.56 5799.14,2400 k1.2
NetB2_3: B2.3 C1.2 IC1.1 | length 3458.5
  Top Layer w50: v1(5151,633) 5151,350 B2.3
  Bottom Layer w10: C1.2 3010,1446.57 3010,1529 3036.24,1555.24 3961.76,1555.24 4780,737 5339.36,737
  Bottom Layer w50: v1(5151,633) 5235.36,633 5339.36,737 IC1.1
NetC2_1: C2.1 IC2B.3 R2.1 | length 2989.9
  Top Layer w10: IC2B.3 4069.2,2712.8 v1(4119,2663) ; C2.1 4926,2926.91 4926,1803 4938.43,1790.57 4938.43,1483.75 4952.17,1470.01 R2.1
  Bottom Layer w10: v1(4119,2663) 4612.61,2663 C2.1
NetC3_1: C3.1 IC3.9 R3.1 | length 6790.1
  Top Layer w10: C3.1 4834.49,2884.25 4834.49,2083.43 4828,2076.94 4828,1629.66 4796.34,1598 R3.1
  Bottom Layer w10: IC3.9 1096.58,1754.99 1138.57,1713 1699,1713 1748,1664 2631.85,1664 3548.32,2580.47 4760.47,2580.47 4940,2760 4940,3010 4900,3050 4865.43,3050 C3.1
NetC8_1: C8.1 IC3.17 L1.1 | length 2558.8
  Top Layer w10: v1(2260,685) 2284.99,709.99 C8.1
  Bottom Layer w10: IC3.17 1120.51,1098 1847,1098 1953,1204 2110,1204 2131,1183 2131,778.99 2260,649.99 ; v1(2260,685) 2260,649.99 ; L1.1 2260,649.99
NetC12_1: C12.1 IC2.3 R14.1 | length 4347.6
  Top Layer w10: IC2.3 3954,2200 3984,2230 v1(3984,2635) ; R14.1 5107.99,1110 5087.99,1090 5002,1090 4992,1100 4992,1259 5158,1425 5158,1731 5040,1849 5040,2258 5002,2296 5002,2618 5130,2746 5130,3108.9 C12.1
  Bottom Layer w10: v1(3984,2635) 4544,3195 5123.11,3195 C12.1
NetC13_1: C13.1 IC3.10 R22.1 | length 6535.8
  Top Layer w10: v1(4479,963) 4593.51,963 4640.51,1010 R22.1 4640.51,1060.51 4676,1096 4676,1265 4553,1388 4553,2878 4870,3195 4988.94,3195 C13.1
  Bottom Layer w10: IC3.10 1119.49,1513 1604,1513 1767,1350 3148.43,1350 3341.93,1156.5 3357.5,1156.5 3544.01,969.99 4472.01,969.99 v1(4479,963)
NetC14_1: C14.1 D3.1 | length 807.3
  Top Layer w10: v1(4868,662) 4833,697 4833,1052.6 4850,1069.6 C14.1
  Bottom Layer w50: D3.1 4724.27,665.25 4724.27,664.05 4870.35,664.05 v1@4872.88,661.52
NetC14_2: C14.2 K11.3 | length 5090.7
  Top Layer w10: C14.2 4872.64,988.36 v1(4873,988)
  Bottom Layer w10: K11.3 370.01,1959.99 633.43,1696.57 1042.66,1696.57 1142.22,1597 1682,1597 1782.08,1496.92 2698.92,1496.92 2777.24,1575.24 4285.76,1575.24 v1(4873,988)
NetC17_2: C17.2 ENC1.A k1D.5 R31.1 | length 3112.3
  Top Layer w10: C17.2 5858.62,1660.2 5863.34,2251.33 5863.37,2254.82 5864.53,2255.97 5864.53,2341.53 5864.11,2346.98 5864.53,2399.48 ccw(c5800,2400) 5864.52,2400.6 5858.62,3141.38 5855.69,3144.31 k1D.5
  Top Layer w50: ENC1.A 5000,2068.15 5000,1500.16 5029.29,1470.87 R31.1
  Bottom Layer w10: R31.1 5669.29,1470.87 C17.2
NetC18_2: C18.2 C55.2 ENC1.1 k1D.3 k1D.7 R11.1 R12.1 | length 3888.8
  Top Layer w10: C55.2 5600,2831 5750,2981 5750,3050 k1D.3 5755,3145 5755,3255 k1D.7
  Top Layer w50: ENC1.1 5104.41,2092.44 C18.2
  Bottom Layer w10: R11.1 R12.1 4662,1708.87 4662,1787 4671.85,1796.85 C18.2 5498,1796.85 5501.15,1800 C55.2
NetD1_1: D1.1 RE1.A2 T1.1 | length 5312
  Top Layer w50: v1(3211,2153) 3211,928.02 RE1.A2
  Bottom Layer w50: v1(3211,2153) 4143.01,2153 T1.1 ; RE1.A2 3497.36,502.64 3705.91,294.09 D1.1
NetD2_1: D2.1 IC3.11 R6.1 R21.2 | length 8364.5
  Top Layer w10: R6.1 R6.1@5432,2249.49 ; D2.1 5525,2926.63 5327.94,2729.57 5327.94,2637.4 R21.2 5432,2505.4 R6.1@5432,2249.49 ; v1(5685.93,1101.07) 5685.93,1105.79 5640,1151.72 5640,1690 5394,1936 5394,2233.49 5410,2249.49 R6.1@5432,2249.49
  Bottom Layer w10: IC3.11 1322.49,1210 1819,1210 1833,1224 2130,1224 2154,1200 2154,1079 2283.01,949.99 3540.87,949.99 3590.86,900 4558,900 4753.95,704.05 4965.95,704.05 5098,572 5490,572 5681,763 5681,1096.15 v1(5685.93,1101.07)
NetDS1_1: DS1.1 IC.6 | length 1052
  Top Layer w10: DS1.1 2960,3369 3271,3680 3271,3797 3490,3797 3500,3787 IC.6
NetDS1_2: DS1.2 IC.5 | length 1358.2
  Top Layer w10: DS1.2 3021,3111 2921,3111 2921,3386 3251,3716 3251,3817 3530,3817 3550,3797 IC.5
NetDS1_3: DS1.3 IC.9 | length 672.7
  Top Layer w10: DS1.3 3160,3350 3350,3540 IC.9
NetDS1_4: DS1.4 IC.4 | length 783.5
  Top Layer w10: DS1.4 3270,3421 3359.93,3421 3600,3661.07 IC.4
NetDS1_5: DS1.5 IC.8 | length 751.5
  Top Layer w10: IC.8 3400,3687 v1(3430,3657)
  Bottom Layer w10: DS1.5 3443.31,3233.31 3510,3233.31 3523,3246.31 3523,3564 v1(3430,3657)
NetDS1_7: DS1.7 IC.3 | length 836.1
  Top Layer w10: DS1.7 3619,3209 3758,3209 3799,3250 3799,3541 3650,3690 IC.3
NetDS1_8: DS1.8 IC.13 | length 1125.5
  Top Layer w10: IC.13 3400,3410 3469,3479 3710,3479 3779,3410 3779,3265 3765,3251 3611.59,3251 3570.59,3210 3561,3210 3521,3170 3521,3130 3540,3111 3621,3111 DS1.8
NetDS1_9: DS1.9 IC.14 | length 768.3
  Top Layer w10: v1(3389,3293) 3409,3293 3443,3327 3450,3327 IC.14
  Bottom Layer w10: v1(3389,3293) 3321,3225 3321,3130 3340,3111 3721,3111 DS1.9
NetDS1_10: DS1.10 IC.7 | length 792.5
  Top Layer w10: IC.7 3450,3701 3488,3663 v1(3537,3663)
  Bottom Layer w10: v1(3537,3663) 3860,3340 DS1.10
NetDS1_11: DS1.11 IC.2 | length 817.7
  Top Layer w10: IC.2 3700,3672 3718,3654 3916,3654 3960,3610 DS1.11
NetDS1_12: DS1.12 IC.15 | length 1260.3
  Top Layer w10: v1(3459,3286) 3500,3327 IC.15
  Bottom Layer w10: v1(3459,3286) 3405,3340 3367,3340 3301,3274 3301,3111 3322,3090 4000,3090 DS1.12
NetIC2_1: IC2.1 R9.1 R22.2 | length 3859.4
  Top Layer w10: IC2.1 4030,2100 4085,2155 4085,2290 4148,2353 4372,2353 4420.75,2304.25 v1(4420.75,2156) 4420.75,948.25 4470,899 4690.31,899 4715.31,924 R22.2 ; R9.1 5560,2249.49 v1(5560,2298)
  Bottom Layer w10: v1(4420.75,2156) 5268,2156 5337,2087 5394,2087 5560,2253 v1(5560,2298)
NetIC2_2: IC2.2 R5.2 R24.2 | length 3950.3
  Top Layer w10: IC2.2 4051,2150 4054,2153 v1(4054,2496) ; R24.2 5338.62,1107.38 5350,1096 5455,1096 5455,1804 5306,1953 5306,2444 v1(5368,2506) ; v1(5368,2637.4) R5.2 5500,2661 v1(5368,2661)
  Bottom Layer w10: v1(4054,2496) 4086,2528 4802,2528 4935,2661 v1(5368,2661) ; v1(5368,2506) v1(5368,2637.4)
NetIC2_4: IC2.4 IC2B.4 | length 626.4
  Top Layer w10: IC2B.4 3830,2738.39 3804,2712.39 3804,2290 3844,2250 IC2.4
NetIC2B_1: IC2B.1 R1.1 R3.2 | length 3827.1
  Top Layer w10: IC2B.1 3885,2661.61 3885,2469 v1(3919,2435) ; R3.2 4871.14,1216 4862,1225.14 4862,1767 4874,1779 v1(4874,1979) ; R1.1 5354,2174.69 v1(5354,2127)
  Bottom Layer w10: v1(3919,2435) 4261,2435 ; v1(4874,1979) 4310,1979 4257,2032 4257,2132 4290,2165 4318,2165 4343,2190 4343,2353 4261,2435 ; v1(5354,2127) 5269.43,2211.57 4498.43,2211.57 4261,2435
NetIC2B_2: IC2B.2 R1.2 R4.2 | length 3347
  Top Layer w10: IC2B.2 3930,2687.2 3943,2674.2 v1(3943,2540) ; v1(4595.59,2272) 4598,2269.59 4598,1399 4715.31,1281.69 R4.2 ; R1.2 5376,2249.49 v1(5376,2399)
  Bottom Layer w10: v1(3943,2540) 3944,2540 4028,2456 4077,2456 4120,2499 4602,2499 ; v1(4595.59,2272) 4595.59,2274.41 4553,2317 4553,2450 4602,2499 ; v1(5376,2399) 5276,2499 4602,2499
NetIC3_1: IC3.1 R7.2 | length 784.4
  Bottom Layer w10: R7.2 558.15,2554.99 IC3.1
NetIC3_2: IC3.2 K7.2 R19.1 | length 2460.9
  Top Layer w10: v1(2100,1855) 2403,1552 2403,1246.16 R19.1
  Bottom Layer w10: K7.2 745,2454.99 IC3.2 1531.49,1901 1720,1901 1766,1855 v1(2100,1855)
NetIC3_7: IC3.7 k5.1 | length 297.5
  Bottom Layer w10: k5.1 IC3.7
NetIC3_8: IC3.8 k5.2 | length 297.5
  Bottom Layer w10: k5.2 IC3.8
NetIC3_12: IC3.12 K9.1 | length 324.6
  Bottom Layer w10: K9.1 813,1449.99 818,1454.99 IC3.12
NetIC3_13: IC3.13 K9.2 | length 324.6
  Bottom Layer w10: K9.2 813,1349.99 818,1354.99 IC3.13
NetIC3_14: IC3.14 K9.3 | length 324.6
  Bottom Layer w10: K9.3 813,1249.99 818,1254.99 IC3.14
NetIC3_15: IC3.15 K9.4 | length 324.6
  Bottom Layer w10: K9.4 813,1149.99 818,1154.99 IC3.15
NetIC3_16: IC3.16 K9.5 | length 324.6
  Bottom Layer w10: K9.5 813,1049.99 818,1054.99 IC3.16
NetIC3_19: IC3.19 R10.1 | length 1258.9
  Bottom Layer w10: IC3.19 1417.99,754.99 1560,897 1800.28,897 R10.1
NetIC3_20: IC3.20 K4.3 | length 1007.7
  Bottom Layer w10: IC3.20 1062.5,569.99 K4.3
NetIC3_21: IC3.21 K4.2 | length 371.2
  Bottom Layer w10: IC3.21 1760,654.99 1775,669.99 K4.2
NetIC3_22: IC3.22 K4.1 | length 371.2
  Bottom Layer w10: IC3.22 1760,754.99 1775,769.99 K4.1
NetIC3_23: IC3.23 K6.3 | length 1304.1
  Bottom Layer w10: K6.3 439.01,709 1439.01,709 IC3.23
NetIC3_24: IC3.24 K6.2 | length 1296.6
  Bottom Layer w10: K6.2 416.9,805 1435.01,805 IC3.24
NetIC3_27: IC3.27 K11.1 | length 1556.3
  Bottom Layer w10: K11.1 604.99,1605 992,1605 1342.01,1254.99 IC3.27
NetIC3_28: IC3.28 K11.4 | length 1848.4
  Top Layer w10: v1(1067,1354.99) IC3.28
  Bottom Layer w10: K11.4 215,1924.99 215,1668 579,1304 1016.01,1304 v1(1067,1354.99)
NetIC3_30: IC3.30 K11.5 | length 1545.5
  Top Layer w10: K11.5 387.01,2097 998,2097 1540.01,1554.99 IC3.30
NetIC3_33: IC3.33 K10.2 | length 333.6
  Bottom Layer w10: IC3.33 1630,1809.99 K10.2
NetIC3_34: IC3.34 K10.3 | length 333.6
  Bottom Layer w10: IC3.34 1855,1954.99 K10.3
NetIC3_35: IC3.35 k12.4 R16.1 | length 2103
  Top Layer w10: k12.4 1835,2244.99 1835,1649 2258,1226 2258,1190 2310,1138 2503.17,1138 R16.1
  Bottom Layer w10: IC3.35 1840,2309.99 k12.4
NetIC3_37: IC3.37 k12.3 | length 478.4
  Bottom Layer w10: IC3.37 1690,2254.99 1794.01,2359 1950.99,2359 k12.3
NetIC3_38: IC3.38 k12.5 | length 478.4
  Bottom Layer w10: IC3.38 1690,2354.99 1794.01,2459 1950.99,2459 k12.5
NetIC3_39: IC3.39 k12.7 | length 478.4
  Bottom Layer w10: IC3.39 1690,2454.99 1794.01,2559 1950.99,2559 k12.7
NetIC3_40: IC3.40 k12.9 | length 478.4
  Bottom Layer w10: IC3.40 1689.01,2659 1950.99,2659 k12.9
NetIC_17: IC.17 k1D.4 | length 3052.6
  Top Layer w10: IC.17 3600,3409 3630,3439 v1(3664,3439)
  Bottom Layer w10: v1(3664,3439) 3821,3282 3821,3130 3840,3111 3990,3111 4010,3131 4010,3170 4059,3219 5265,3219 5530,2954 5845,2954 5845,3130 5825,3150 5750,3150 k1D.4
NetIC_18: IC.18 k1D.2 | length 3108.1
  Top Layer w10: v1(3570,3273) 3630,3273 3650,3293 IC.18
  Bottom Layer w10: v1(3570,3273) 3570,3557 3497,3630 3497,3690 3510,3703 4286,3703 4645,3344 5219,3344 5563,3000 k1D.2
Netk1_1: k1.1 RE1.11 | length 2363.2
  Top Layer w50: RE1.11 v1(4233.77,1882)
  Bottom Layer w50: v1(4233.77,1882) 5382,1882 k1.1
Netk2_2: k2.2 RE1.12 RE1.24 | length 1539.7
  Top Layer w50: RE1.24 3632.35,1505.88 3632.35,1495.98 3787.14,1341.19 3787.14,1246.37 RE1.12 3998.2,1035.3 3998.2,601.8 k2.2
  Bottom Layer w50: RE1.12 RE1.12@3798.14,1235.37
NetK8_1: K8.1 L2.3 | length 782.8
  Bottom Layer w10: K8.1 800,3500 L2.3
NetK8_2: K8.2 L2.2 | length 700
  Bottom Layer w10: K8.2 L2.2
Netk12_2: k12.2 R15.1 | length 1217.4
  Top Layer w10: k12.2 1855,2164.99 1855,1669.83 R15.1
NetL2_4: L2.4 T3.3 | length 1141.4
  Bottom Layer w10: L2.4 1149,3251 2149,3251 T3.3
NetR5_1: R5.1 R9.2 | length 428
  Top Layer w10: R5.1 5500,2194.69 5520,2174.69 R9.2
NetR7_1: R7.1 R20.2 T4.2 | length 1500.2
  Bottom Layer w10: R7.1 396,3206.84 402.84,3200 R20.2 755,2945 1509,2945 1600,2854 T4.2
NetR10_2: R10.2 R13.2 T1.2 | length 2536.6
  Bottom Layer w10: R10.2 2131,1557.51 2131.98,1558.49 R13.2 2237.91,1516.92 2590,1516.92 3017.08,1944 4036.37,1944 T1.2
NetR17_2: R17.2 T2.2 T4.1 T5.2 | length 1869
  Top Layer w10: T4.1 1650,2950 T5.2 1324,3276 1324,3395 1429,3500 T2.2
  Bottom Layer w10: R17.2 712.83,3200 T5.2
NetR18_1: R18.1 T2.3 T5.1 | length 585.9
  Top Layer w10: T2.3 1756,3550 1806,3500 R18.1
  Bottom Layer w10: T5.1 1647.64,3550 T2.3
NetR18_2: R18.2 T3.1 | length 333.3
  Top Layer w10: R18.2 1937.4,3450 1987.4,3400 T3.1
VIN: B1.3 C5.2 R6.2 | length 4060.1
  Top Layer w10: B1.3 4250,1438.89 4380.75,1569.64 4380.75,1654.77 4361.23,1654.77 v1(4341,1675) ; R6.2 5480,2174.69 5525,2129.69 v1(5525,1910)
  Top Layer w50: C5.2 3294,2236 v1(3294,1496) 3296,1496 v1@3300,1500 ; v1(4211,1247) 4250,1286 B1.3
  Bottom Layer w10: v1(4341,1675) 4505,1839 5454,1839 v1(5525,1910)
  Bottom Layer w50: C5.2 C5.2@3186.73,2346.73 ; v1(3294,1496) 3313.24,1515.24 3942.76,1515.24 v1(4211,1247)
pads on no net: DS1.6 DS1.13 ENC1.C IC2.5 IC2.6 IC2.7 IC2B.5 IC2B.6 IC2B.7 IC3.3 IC3.4 IC3.25 IC3.26 IC3.29 IC3.36 IC.10 IC.11 IC.12 IC.19 IC.20 k1D.6 k1D.8 k1D.9 K6.MH1 K6.MH2 k12.6 k12.8 RE1.14

## Text inside footprints (layer, text, board x,y; h text height)
k1D: Top Overlay "10" at 5720,3460 h50 r90; Top Overlay "9" at 5820,3460 h50 r90; Top Overlay "1" at 5820,2920 h50 r90; Top Overlay "2" at 5720,2900 h50 r90
K11: Top Overlay "5" at 320,2059.6 h39.37 r90; Top Overlay "1" at 320,1847 h39.37 r90
k12: Top Overlay "10" at 1920,2669.99 h50 r90; Top Overlay "9" at 2020,2669.99 h50 r90; Top Overlay "1" at 2020,2129.99 h50 r90; Top Overlay "2" at 1920,2109.99 h50 r90